# Altium PCB 20bit_40MS_ADC_DIOT.PcbDoc (part 5 of 8)
Units mm, origin at the board's own origin, x right, y up, seen from the top; angles counter-clockwise.
Board outline 222.63 x 100.1 mm, 6 copper layers (L1, L2, L3, L4, L5, L6), stack 2.522 mm thick; 616 components, 374 nets, 2097 pads, 984 vias.
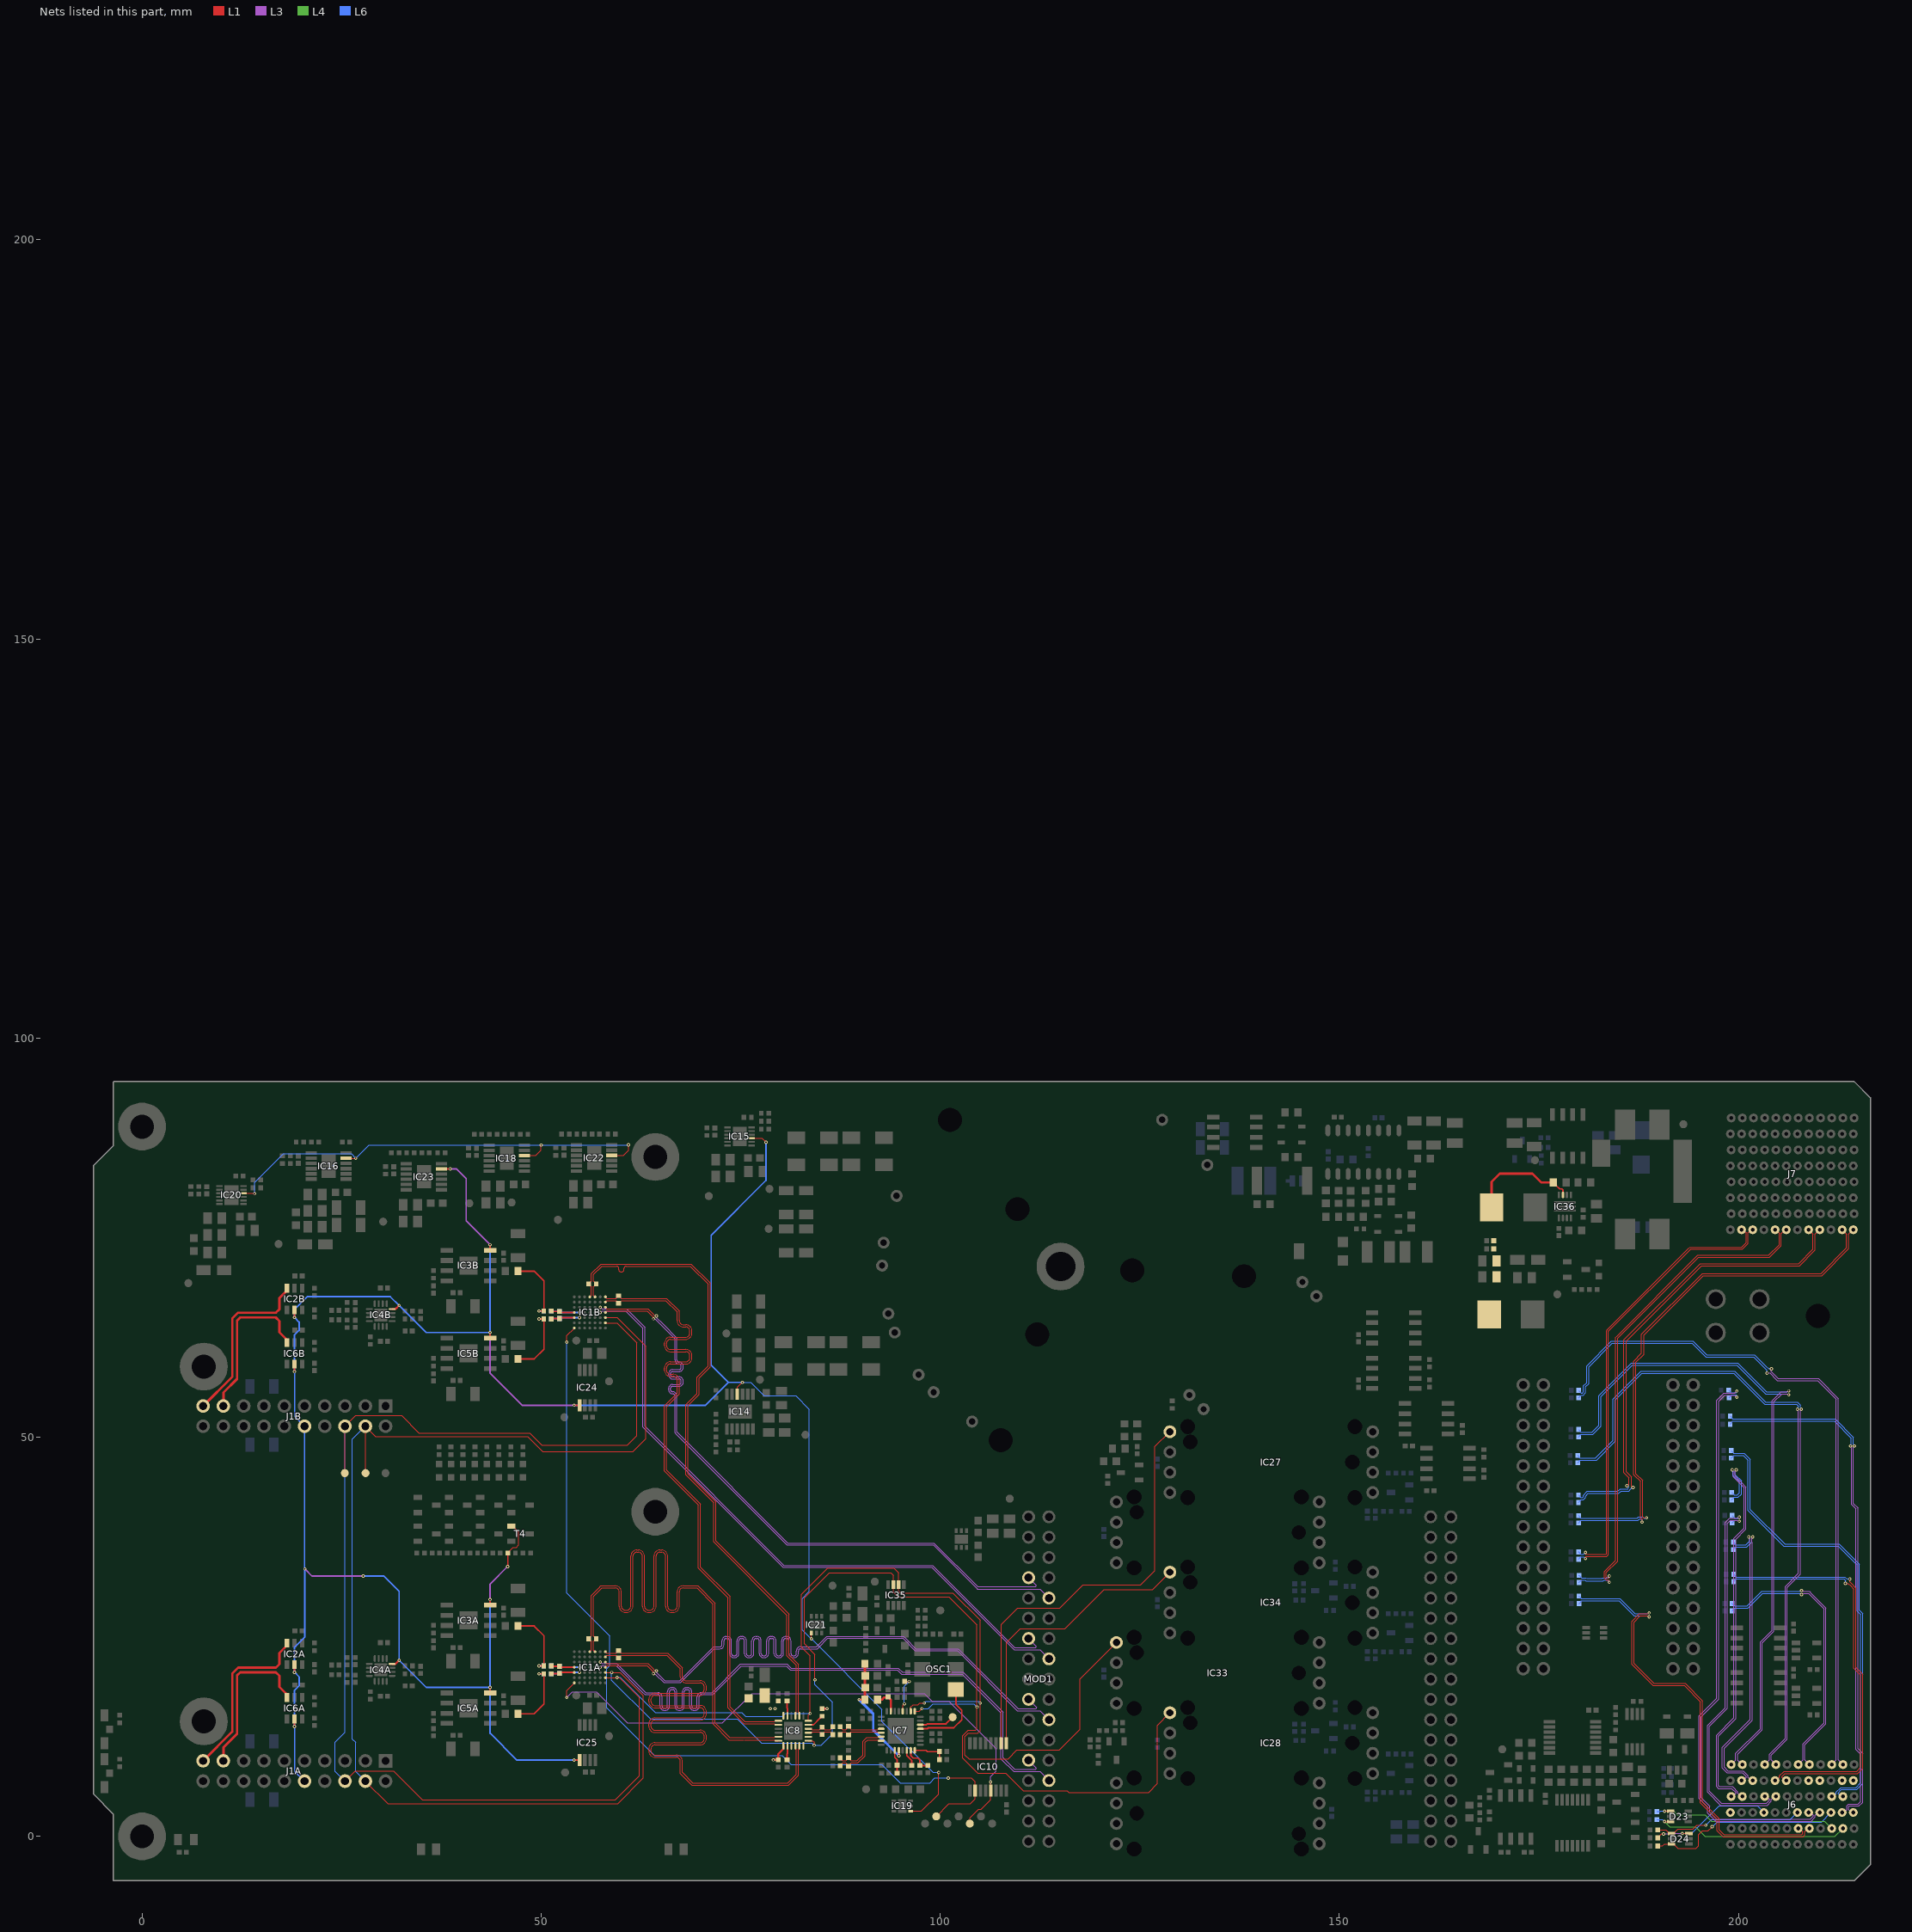
[diagram p7: the nets of this part, all layers, seen from the top]

## Via types
v1: diameter 0.4, hole 0.2, L1 to L6, tented both sides, 984 vias

## Nets (pads, with @x,y where several pads share a name; then routed paths per layer and width w, separated by ;. In a path a pad name is that pad's centre, name@x,y a point inside that pad or via, vN(x,y) a via of type N, cw(c..) or ccw(c..) an arc to the next point about the centre after c; other vN are vias at no path point) (continued)
BP_IO.LVDS_P12: (continued)
  L1 w0.125: v1(188.471,39.905) 188.117,39.905 187.998,40.024 187.998,44.573 187.148,45.423 187.148,59.403 188.137,60.392 188.137,62.78 195.593,70.236 210.445,70.236 213.812,73.603 213.812,74.779 213.82,74.787 213.82,75.425 J7.A1@214.383,75.988
  L6 w0.125: R157.1@179.96,40.17 179.96,40.15 180.261,39.85 187.304,39.85 187.472,40.019 188.003,40.019 188.157,39.865 188.431,39.865 v1(188.471,39.905)
BP_IO.LVDS_P13: J7.J1 R158.1 | length 56.4
  L1 w0.125: v1(180.837,34.798) 180.837,34.987 180.91,35.06 183.483,35.06 183.703,35.28 183.703,63.249 194.004,73.55 200.504,73.55 201.208,74.254 201.208,75.52 201.208,75.624 201.572,75.988 J7.J1@201.783,75.988
  L6 w0.125: R158.1@179.96,34.709 179.96,34.729 180.261,35.029 180.626,35.029 180.837,34.819 v1(180.837,34.798)
BP_IO.LVDS_P14: J7.G1 R159.1 | length 62.9
  L1 w0.125: v1(183.808,32.601) 183.808,32.412 183.735,32.339 183.558,32.339 183.446,32.451 183.446,33.048 184.85,34.452 184.85,62.397 195.004,72.55 203.904,72.55 205.35,73.996 205.35,75.515 205.824,75.988 J7.G1@205.983,75.988
  L6 w0.125: R159.1@179.986,32.683 R159.1@180.037,32.683 ; R159.1@180.04,32.7 180.04,32.68 180.333,32.387 180.886,32.387 180.99,32.284 182.949,32.284 183.016,32.35 183.558,32.35 v1(183.808,32.601)
BP_IO.LVDS_P15: J6.E2 R143.2 | length 57.9
  L1 w0.125: v1(188.8,27.987) 188.726,27.987 188.613,27.874 187.587,27.874 186.626,26.913 186.626,21.547 189.273,18.9 193.2,18.9 195.226,16.874 195.226,4.187 197.326,2.087 197.326,0.687 198.087,-0.074 208.059,-0.074 208.32,0.187 208.32,0.508 208.32,0.612 208.696,0.988 J6.E2@208.883,0.988
  L6 w0.125: R143.2@179.999,30.112 180.226,29.884 180.226,29.842 180.299,29.769 185.131,29.769 187.026,27.874 188.613,27.874 188.726,27.987 v1(188.8,27.987)
BP_MGT_Rx_N: J6.E5
BP_MGT_Rx_P: J6.D5
BP_MGT_Tx_N: J6.B5
BP_MGT_Tx_P: J6.A5
CSn_0: IC10.1 IC34.8 | length 36.8
  L1 w0.125: IC10.1@108.275,11.65 108.275,24.275 110,26 115.6,26 120.5,30.9 126.583,30.9 IC34.8@128.768,33.085
CSn_1: IC10.2 IC27.8 | length 55.1
  L1 w0.125: IC10.2@107.625,11.65 107.625,26.525 109.7,28.6 115,28.6 117.9,31.5 125.1,31.5 126.9,33.3 126.9,48.817 IC27.8@128.768,50.685